# Altium PCB Micro_DSUB_IDC_with_optical_module.PCBDOC
Units mil, origin at the board's own origin, x right, y up, seen from the top; angles counter-clockwise.
Board outline 650 x 2475 mil, 4 copper layers (L1, L2, L3, L4), stack 69.291 mil thick; 4 components, 30 nets, 74 pads, 0 vias.
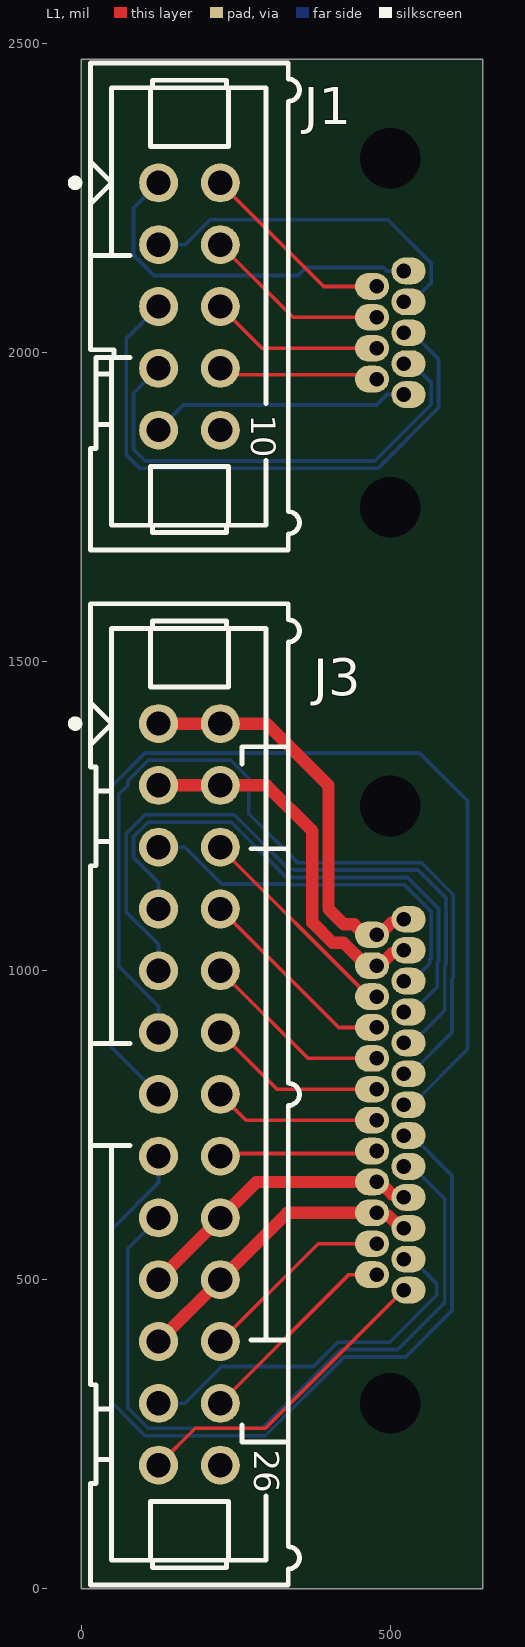
[diagram p0: L1 view]
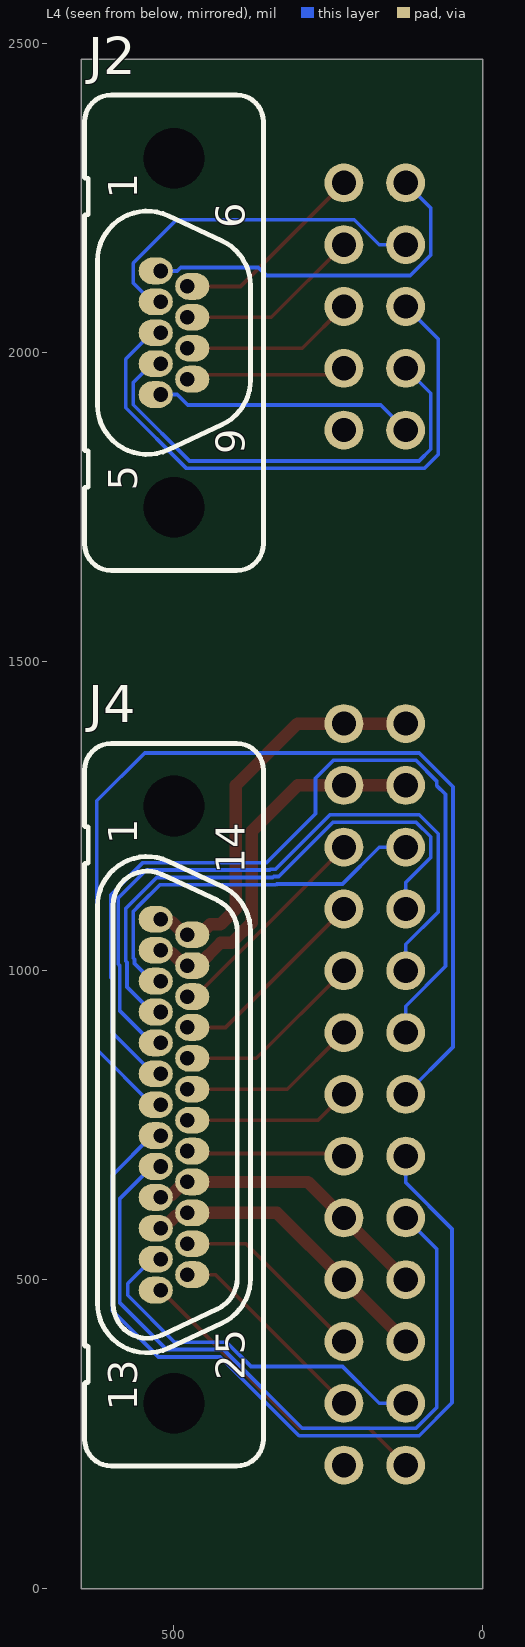
[diagram p1: L4 view, seen from below]
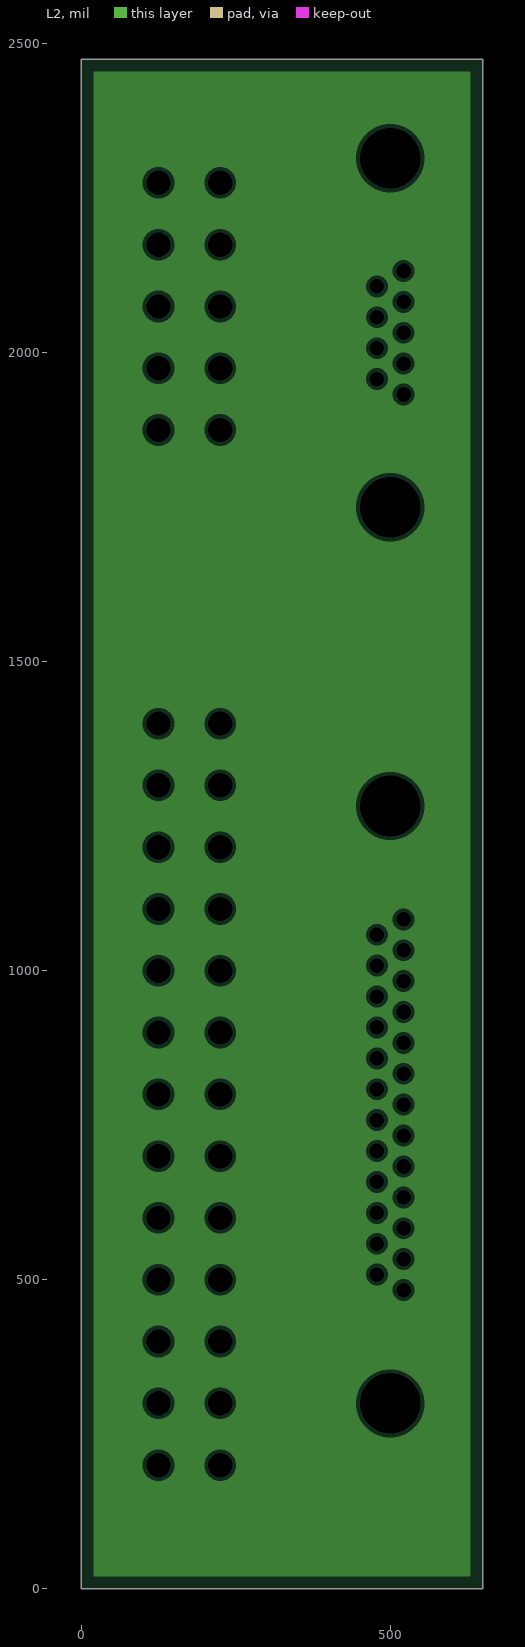
[diagram p2: L2, clearances drawn from the general rule]
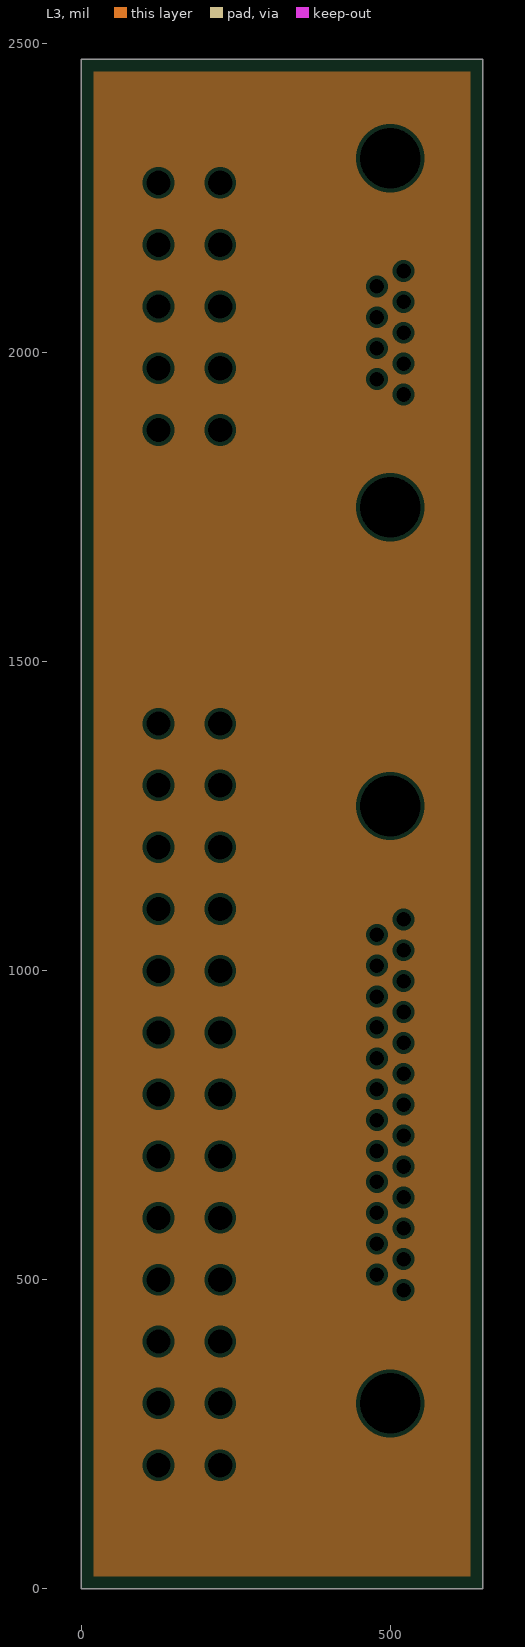
[diagram p3: L3, clearances drawn from the general rule]

## Layer stack, top to bottom
Top Solder: solder mask 0.3937, Solder Resist, Dk 3.5
L1: signal copper 1.378
Dielectric 1: prepreg 14.1732, PP-006, Dk 4.1
L2: plane copper 1.378
Dielectric1: core 35.4331, FR-4, Dk 4.8
L3: plane copper 1.378
Dielectric 2: prepreg 14.1732, PP-006, Dk 4.1
L4: signal copper 1.378
Bottom Solder: solder mask 0.3937, Solder Resist, Dk 3.5

## Board outline
0,0 0,2475 650,2475 650,0

## Design rules (kind name [scope] priority, off if disabled: settings)
BoardOutlineClearance [All] p1: gap=10 ignorepadtopadclearanceinfootprint=FALSE except(0: Arc-SplitContinuation Track-SplitContinuation SMDPad-SplitContinuation THPad-SplitContinuation Via-SplitContinuation Fill-SplitContinuation Poly-SplitContinuation Region-SplitContinuation Text-SplitContinuation)
Clearance [All] p1: gap=6 ignorepadtopadclearanceinfootprint=FALSE
ComponentClearance [All] p1: gap=0 collisioncheckmode=3 verticalgap=13.78 showdistances=FALSE
FabricationTestPointUsage TestPointUsage [All] p1: valid=0 allowmultiple=FALSE
FabricationTestpoint Testpoint [All] p1: side=3 testpointundercomponent=TRUE minsize=40 maxsize=100 preferedsize=60 minholesize=0 maxholesize=40 preferedholesize=32.01 testpointgrid=0.98 allowsidetop=TRUE allowsidebottom=TRUE usegrid=TRUE gridtolerance=0.01
HoleSize [All] p1: absolutevalues=TRUE maxlimit=196.85 minlimit=7.87 maxpercent=80.000 minpercent=20.000
HoleToHoleClearance [All] p1: gap=7.87 allowstackedmicrovias=TRUE
MinimumSolderMaskSliver [All] p1: minsoldermaskwidth=3.94
PermittedLayers [All] p1: toplayerpermitted=TRUE bottomlayerpermitted=FALSE
PlaneClearance [All] p1: clearance=5.91
PlaneConnect [All] p1: pad.planeconnectstyle=Relief pad.reliefexpansion=20 pad.reliefentries=4 pad.reliefconductorwidth=15 pad.reliefairgap=15 via.planeconnectstyle=Direct via.reliefexpansion=20 via.reliefentries=4 via.reliefconductorwidth=15 via.reliefairgap=15
PolygonConnect "Vias Direct Connect" [IsVia] p1: connectstyle=Direct reliefconductorwidth=10 reliefentries=4 polygonreliefangle="90 Angle" airgapwidth=10
PolygonConnect [All] p2: connectstyle=Relief reliefconductorwidth=7.87 reliefentries=4 polygonreliefangle="90 Angle" airgapwidth=5.91
RoomDefinition Micro_DSUB_IDC [InComponentClass('Micro_DSUB_IDC')] p1 off: confinementstyle=ConfineIn formatcopy=TRUE lockcomponents=FALSE outline 6125,3875 15100,3875 15100,4175 6125,4175
RoutingVias RoutingVias_HP [InNetClass('HP')] p1: holewidth=28 width=50 viastyle="Through Hole" minholewidth=28 minwidth=50 maxholewidth=28 maxwidth=50
RoutingVias [All] p2: holewidth=7.87 width=19.68 viastyle="Through Hole" minholewidth=7.87 minwidth=19.68 maxholewidth=23.62 maxwidth=39.37
SilkToSilkClearance [All] p1: silktosilkclearance=3.94
SilkToSolderMaskClearance SilkscreenOverComponentPads [IsPad] p1: minsilkscreentomaskgap=3.94 clearancetoexposedcopper=TRUE
SolderMaskExpansion [All] p1: expansion=0 istentingtop=FALSE
Width Width_HP [InNetClass('HP')] p1: maxlimit=50 minlimit=20 preferedwidth=30
Width [All] p2: maxlimit=100 minlimit=6 preferedwidth=6
20 further rules are at their usual default settings.

## Classes and differential pairs
net class HP: "FR TEC BG+" "FR TEC BG-" "FR TEC MIOB+" "FR TEC MIOB-"

## Components (designator, comment, footprint, x,y, rotation, side; value= is the part's Value field where it differs from the comment)
J1 "Header 10" 3M_N2510-6002RB 175.01,2075 r270 top
J2 "MICRO D" NORCOMP_380-009-213L001 500,2032.48 r90 bottom
J3 "Header 26" 3M_N2526-6002RB 175,800 r270 top
J4 "MICRO D" NORCOMP_380-025-213L001 500,783.27 r90 bottom

## Footprints (in the part's own frame and the unit in brackets; to place one, negate y for a bottom-side part, rotate by r counter-clockwise, add the part's x,y. Pads: shape width x height; smd on the part's side, far side on the other; paste and mask are expansions set on the pad)
3M_N2510-6002RB [mm] "10 Contacts - Straight .100\" x .100\" Low Profile Four-Wall Header"
  round 1.6 hole 1: 1(-5.08,-1.27) 2(-5.08,1.27) 3(-2.54,-1.27) 4(-2.54,1.27) 5(0,-1.27) 6(0,1.27) 7(2.54,-1.27) 8(2.54,1.27) 9(5.08,-1.27) 10(5.08,1.27)
  silkscreen extent -10.01,-4.85 10.01,4.52, body extent -10.01,-4.11 10.01,4.52, height 9.91
3M_N2526-6002RB [mm] "26 Contacts - Straight .100\" x .100\" Low Profile Four-Wall Header"
  round 1.6 hole 1: 1(-15.24,-1.27) 2(-15.24,1.27) 3(-12.7,-1.27) 4(-12.7,1.27) 5(-10.16,-1.27) 6(-10.16,1.27) 7(-7.62,-1.27) 8(-7.62,1.27) 9(-5.08,-1.27) 10(-5.08,1.27) 11(-2.54,-1.27) 12(-2.54,1.27) 13(0,-1.27) 14(0,1.27) 15(2.54,-1.27) 16(2.54,1.27) 17(5.08,-1.27) 18(5.08,1.27) 19(7.62,-1.27) 20(7.62,1.27) 21(10.16,-1.27) 22(10.16,1.27) 23(12.7,-1.27) 24(12.7,1.27) 25(15.24,-1.27) 26(15.24,1.27)
  silkscreen extent -20.17,-4.85 20.17,4.52, body extent -20.17,-4.11 20.17,4.52, height 9.91
NORCOMP_380-009-213L001 [mm] "9 Contacts, Pitch 1.27, MICRO-D VERTICAL PCB MOUNT, 380 Series"
  oval 1.1x1.4 hole 0.6 copper offset 0,0.2: 1(2.54,0.55) 2(1.27,0.55) 3(0,0.55) 4(-1.27,0.55) 5(-2.54,0.55)
  oval 1.1x1.4 hole 0.6 copper offset 0,-0.2: 6(1.905,-0.55) 7(0.635,-0.55) 8(-0.635,-0.55) 9(-1.905,-0.55)
  round 0.5 hole 2.5 unplated mask+1: 10(7.175,0) 11(-7.175,0)
  silkscreen extent -9.77,-3.68 9.77,3.68, body extent -9.77,-3.67 9.77,3.67, height 8.3
NORCOMP_380-025-213L001 [mm] "9 Contacts, Pitch 1.27, MICRO-D VERTICAL PCB MOUNT, 380 Series"
  oval 1.1x1.4 hole 0.6 copper offset 0,0.2: 1(7.62,0.55) 2(6.35,0.55) 3(5.08,0.55) 4(3.81,0.55) 5(2.54,0.55) 6(1.27,0.55) 7(0,0.55) 8(-1.27,0.55) 9(-2.54,0.55) 10(-3.81,0.55) 11(-5.08,0.55) 12(-6.35,0.55) 13(-7.62,0.55)
  oval 1.1x1.4 hole 0.6 copper offset 0,-0.2: 14(6.985,-0.55) 15(5.715,-0.55) 16(4.445,-0.55) 17(3.175,-0.55) 18(1.905,-0.55) 19(0.635,-0.55) 20(-0.635,-0.55) 21(-1.905,-0.55) 22(-3.175,-0.55) 23(-4.445,-0.55) 24(-5.715,-0.55) 25(-6.985,-0.55)
  round 0.5 hole 2.5 unplated mask+1: 26(12.275,0) 27(-12.275,0)
  silkscreen extent -14.85,-3.68 14.85,3.68, body extent -14.85,-3.67 14.85,3.67, height 8.3

## Part data
J1: library part 3M_N2510-6002RB, "Connector 10 Male", Manufacturer=3M, Manufacturer Part Number=N2510-6002RB, Author="CERN DEM JLC", Component Type=Standard, ComponentHeight=10.03mm, CreateDate=11.02.2009, Family="Header 10", HelpURL=\\cern.ch\dfs\Applications\Altium\Datasheets\3M_N2510-6002RB.pdf, LatestRevisionDate=11.08.2009, Mounted=Yes, Part Description="10 Contacts, Straight .100'' x .100'' Low Profile Four-Wall Header, 2500 Series", Part Number=3M_N2510-6002RB, Pin Count=10, PressFit=No, Sense=No, SMD=No, Socket=No, Status=None
J2: library part NORCOMP_380-009-213L001, "Connector D-sub 9 Female", Manufacturer=NORCOMP, Manufacturer Part Number=380-009-213L001, Author="CERN DEM HF", Component Type=Standard, ComponentHeight=8.5mm, CreateDate=19.05.2022, Family="MICRO D", HelpURL=\\cern.ch\dfs\Applications\Altium\Datasheets\NORCOMP_380-XXX-213L001.pdf, LatestRevisionDate=19.05.2022, Mounted=Yes, Part Description="9 Contacts, Pitch 1.27, MICRO-D VERTICAL PCB MOUNT, 380 Series", Part Number=NORCOMP_380-009-213L001, Pin Count=11, PressFit=No, Sense=No, SMD=No, Socket=No, Status="Not Recommended"
J3: library part 3M_N2526-6002RB, "Connector 26 Male", Manufacturer=3M, Manufacturer Part Number=N2526-6002RB, Author="CERN DEM JLC", Component Type=Standard, ComponentHeight=10.03mm, CreateDate=11.02.2009, Family="Header 26", HelpURL=\\cern.ch\dfs\Applications\Altium\Datasheets\3M_N2526-6002RB.pdf, LatestRevisionDate=11.08.2009, Mounted=Yes, Part Description="26 Contacts, Straight .100'' x .100'' Low Profile Four-Wall Header, 2500 Series", Part Number=3M_N2526-6002RB, Pin Count=26, PressFit=No, Sense=No, SMD=No, Socket=No, Status=None
J4: library part NORCOMP_380-025-213L001, "Connector D-sub 25 Female", Manufacturer=NORCOMP, Manufacturer Part Number=380-025-213L001, Author="CERN DEM HF", Component Type=Standard, ComponentHeight=8.5mm, CreateDate=20.05.2022, Family="MICRO D", HelpURL=\\cern.ch\dfs\Applications\Altium\Datasheets\NORCOMP_380-xxx-213L001.pdf, LatestRevisionDate=20.05.2022, Mounted=Yes, Part Description="25 Contacts, Pitch 1.27, MICRO-D VERTICAL PCB MOUNT, 380 Series", Part Number=NORCOMP_380-025-213L001, Pin Count=27, PressFit=No, Sense=No, SMD=No, Socket=No, Status="Not Recommended"

## Nets (pads, with @x,y where several pads share a name; then routed paths per layer and width w, separated by ;. In a path a pad name is that pad's centre, name@x,y a point inside that pad or via, vN(x,y) a via of type N, cw(c..) or ccw(c..) an arc to the next point about the centre after c; other vN are vias at no path point)
"FR TEC BG+": J3.20 J3.21 J4.11 J4.23 | length 493.3
  L1 w20: J3.21 J3.20 333.27,608.27 J4.23 482.81,603.81 496.77,603.81 517.32,583.27 J4.11
"FR TEC BG-": J3.18 J3.19 J4.10 J4.22 | length 472.6
  L1 w20: J3.19 283.27,658.27 J4.22 482.68,658.27 503.23,637.73 517.19,637.73 J4.10
"FR TEC MIOB+": J3.3 J3.4 J4.2 J4.15 | length 614.6
  L1 w20: J3.3 J3.4 300,1300 374,1226 374,1077.88 406.58,1045.3 424.28,1045.3 461.32,1008.27 482.68,1008.27 503.23,1028.81 517.19,1028.81 J4.2
"FR TEC MIOB-": J3.1 J3.2 J4.1 J4.14 | length 665.7
  L1 w20: J3.1 J3.2 300,1400 400,1300 400,1100 425,1075 441.53,1075 458.26,1058.27 J4.14 482.68,1058.27 503.23,1078.81 517.19,1078.81 J4.1
"FR_PD1 Anode": J1.6 J2.8 | length 281.3
  L1 w6: J1.6 292.53,2007.48 J2.8
"FR_PD1 Kathode": J1.5 J2.3 | length 969.6
  L4 w6: J1.5 72.52,2022.51 72.52,1835.51 95.03,1813 479.97,1813 578.09,1911.12 578.09,1989.83 535.43,2032.48 J2.3
"FR_PD2 Anode": J1.2 J2.6 | length 322.7
  L1 w6: J1.2 392.53,2107.48 J2.6
"FR_PD2 Kathode": J1.1 J2.1 | length 592.2
  L4 w6: J1.1 84.52,2234.51 84.52,2158.23 117.74,2125 350.47,2125 363.6,2138.13 489.08,2138.13 494.73,2132.48 J2.1
"FR_PD3 Anode": J1.4 J2.7 | length 302
  L1 w6: J1.4 342.53,2057.48 J2.7
"FR_PD3 Kathode": J1.3 J2.2 | length 576.1
  L4 w6: J1.3 167.74,2175 208.24,2215.5 495.77,2215.5 566.09,2145.18 566.09,2113.13 535.43,2082.48 J2.2
"FR_Temperature Sensor 1_1": J3.15 J4.8 | length 1410
  L4 w6: J3.15 125.01,657.27 50,582.26 50,300.77 103.26,247.51 297.51,247.51 425,375 525,375 600,450 600,668.7 535.43,733.27 J4.8
"FR_Temperature Sensor 1_2": J3.14 J4.20 | length 270.6
  L1 w6: J3.14 266.74,758.27 J4.20
"FR_Temperature Sensor 2_1": J3.17 J4.9 | length 1194.9
  L4 w6: J3.17 75,549.99 75,292.74 108.23,259.51 292.54,259.51 420.03,387 512,387 588,463 588,630.7 535.43,683.27 J4.9
"FR_Temperature Sensor 2_2": J3.16 J4.21 | length 256.8
  L1 w6: J3.16 229.14,704.14 474.21,704.14 J4.21
"FR_Temperature Sensor 3_1": J3.25 J4.13 | length 514
  L1 w6: J3.25 184.51,259.51 297.89,259.51 J4.13
"FR_Temperature Sensor 3_2": J3.24 J4.25 | length 339.6
  L1 w6: J3.24 433.27,508.27 J4.25
"FR_Temperature Sensor 4_1": J3.13 J4.7 | length 1703.3
  L4 w6: J3.13 48.51,876.5 48.51,1297.75 103.26,1352.5 547.5,1352.5 625,1275 625,872.83 535.43,783.27 J4.7
"FR_Temperature Sensor 4_2": J3.12 J4.19 | length 291.3
  L1 w6: J3.12 316.74,808.27 J4.19
"FR_Temperature Sensor 5_1": J3.7 J4.4 | length 893.9
  L4 w6: J3.7 125.01,1142.73 84.51,1183.23 84.51,1216.78 108.23,1240.5 242.53,1240.5 330.53,1152.5 338.56,1152.5 340.06,1151 528.02,1151 578.09,1100.94 578.09,1015.6 576,1013.51 576,973.83 535.43,933.27 J4.4
"FR_Temperature Sensor 5_2": J3.6 J4.16 | length 354.1
  L1 w6: J3.6 225.01,1198.91 465.65,958.27 J4.16
"FR_Temperature Sensor 6_1": J3.11 J4.6 | length 1434.3
  L4 w6: J3.11 125.01,942.73 60.51,1007.23 60.51,1285.51 75,1300 75,1307.26 108.23,1340.5 241.78,1340.5 270.89,1311.39 270.89,1254.11 350,1175 550,1175 602.09,1122.91 602.09,988.54 600,986.46 600,900 533.27,833.27 J4.6
"FR_Temperature Sensor 6_2": J3.10 J4.18 | length 312
  L1 w6: J3.10 366.74,858.27 J4.18
"FR_Temperature Sensor 7_1": J3.9 J4.5 | length 1100.6
  L4 w6: J3.9 125.01,1042.73 72.51,1095.23 72.51,1221.75 103.26,1252.5 247.5,1252.5 335.5,1164.5 343.53,1164.5 345.03,1163 545.03,1163 590.09,1117.94 590.09,1010.63 588,1008.54 588,935.83 535.43,883.27 J4.5
"FR_Temperature Sensor 7_2": J3.8 J4.17 | length 332.8
  L1 w6: J3.8 416.74,908.27 J4.17
"FR_Temperature Sensor 8_1": J3.23 J4.12 | length 610.9
  L4 w6: J3.23 167.74,300 227.24,359.51 375.57,359.51 415.06,399 499,399 575,475 575,493.7 535.43,533.27 J4.12
"FR_Temperature Sensor 8_2": J3.22 J4.24 | length 318.9
  L1 w6: J3.22 383.27,558.27 J4.24
NetJ1_7: J1.7 J2.4 | length 767.8
  L4 w6: J1.7 84.52,1934.51 84.52,1844 103.51,1825 475,1825 566.09,1916.09 566.09,1951.83 535.43,1982.48 J2.4
NetJ1_8: J1.8 J2.9 | length 260.6
  L1 w6: J1.8 235.4,1964.62 471.21,1964.62 J2.9
NetJ1_9: J1.9 J2.5 | length 420.4
  L4 w6: J1.9 165.51,1915.5 477.75,1915.5 494.73,1932.48 J2.5
NetJ3_5: J3.5 J4.3 | length 623.3
  L4 w6: J3.5 167.74,1200 227.24,1140.5 333.59,1140.5 335.09,1139 523.05,1139 554.09,1107.96 566.09,1095.96 566.09,1020.57 564,1018.48 564,1011.83 535.43,983.27 J4.3
pads on no net: J1.10 J2.10 J2.11 J3.26 J4.26 J4.27

## Polygon pours and split planes (outlines as drawn)
no net on L2 (split plane): 629.9,20.1 20.1,20.1 20.1,2454.9 629.9,2454.9
no net on L3 (split plane): 629.9,20.1 20.1,20.1 20.1,2454.9 629.9,2454.9

## Silkscreen, mask and mechanical layers (free items; w line width, h text height)
Mechanical 1:
  the board outline again, w10

## Text inside footprints (layer, text, board x,y; h text height)
J1: Top Overlay "10" at 275.01,1900 h39.37 r270; Mechanical 14 "10" at 275.01,1900 h39.37 r270
J2: Bottom Overlay "6" at 385.83,2201.77 h47.24 r270; Bottom Overlay "9" at 385.83,1835.63 h47.24 r270; Bottom Overlay "1" at 559.06,2249.02 h47.24 r270; Bottom Overlay "5" at 559.06,1776.57 h47.24 r270
J3: Top Overlay "26" at 280.01,225 h40 r270; Mechanical 14 "26" at 280.01,225 h40 r270
J4: Bottom Overlay "1" at 559.06,1204.53 h47.24 r270; Bottom Overlay "14" at 385.83,1157.28 h47.24 r270; Bottom Overlay "13" at 559.06,288 h47.24 r270; Bottom Overlay "25" at 385.83,337.38 h47.24 r270